# Altium PCB stmsheet.PcbDoc
Units mil, origin at the board's own origin, x right, y up, seen from the top; angles counter-clockwise.
Board outline 6000 x 4000 mil, 2 copper layers (Top Layer, Bottom Layer); 139 components, 90 nets, 397 pads, 1 vias.
Unrouted connection lines stored in the file: 169.
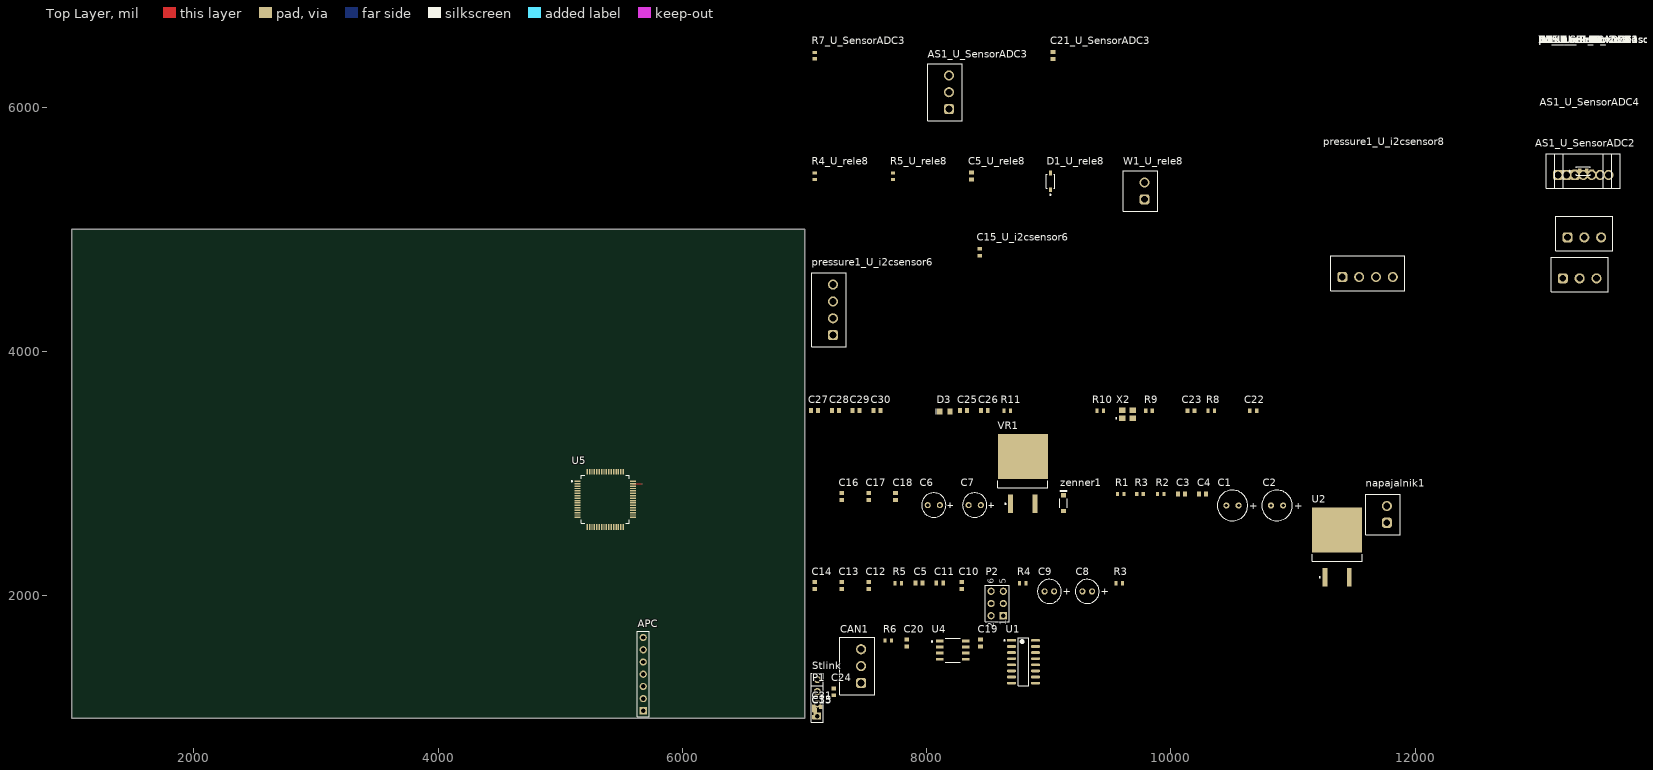
[diagram p0: Top Layer view]
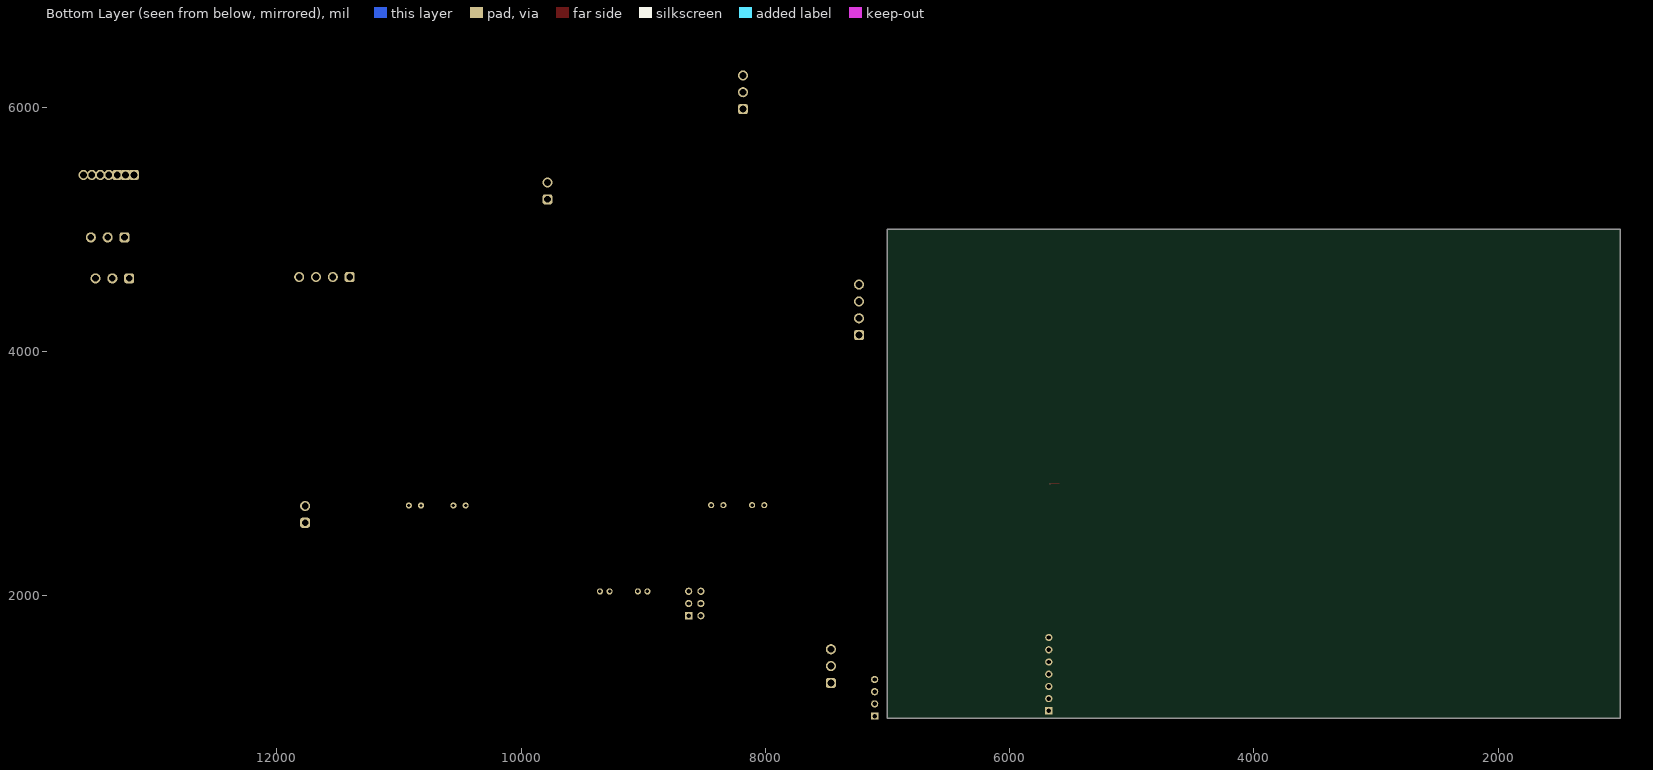
[diagram p1: Bottom Layer view, seen from below]

## Layer stack, top to bottom
Top Solder: solder mask 0.4, Solder Resist, Dk 3.5
Top Layer: signal copper 1.4
Dielectric 1: dielectric 12.6, FR-4, Dk 4.8
Bottom Layer: signal copper 1.4
Bottom Solder: solder mask 0.4, Solder Resist, Dk 3.5

## Board outline
1000,1000 7000,1000 7000,5000 1000,5000

## Design rules (kind name [scope] priority, off if disabled: settings)
Clearance [All] p1: gap=10 ignorepadtopadclearanceinfootprint=FALSE except(0: Arc-Hole Track-Hole SMDPad-Hole THPad-Hole Via-Hole Fill-Hole Poly-Hole Region-Hole Text-Hole)
PolygonConnect [All] p1: connectstyle=Relief reliefconductorwidth=10 reliefentries=4 polygonreliefangle="90 Angle" airgapwidth=10
RoutingVias [All] p1: holewidth=28 width=50 viastyle="Through Hole" minholewidth=28 minwidth=50 maxholewidth=28 maxwidth=50
SolderMaskExpansion [All] p1: expansion=4 istentingtop=FALSE
Width [All] p1: maxlimit=10 minlimit=10 preferedwidth=10
30 further rules are at their usual default settings.

## Classes and differential pairs
component class U_CAN: C19 C20 CAN1 R6 U4
channel class i2csensor: U_i2csensor1 U_i2csensor2 U_i2csensor3 U_i2csensor4 U_i2csensor5 U_i2csensor6 U_i2csensor7 U_i2csensor8
component class U_stmschematic: C22 C23 C24 C25 C26 C27 C28 C29 C30 D3 J? P1 R8 R9 R10 R11 Stlink U5 X2
component class U_i2csensor8: C15_U_i2csensor8 pressure1_U_i2csensor8
component class U_i2csensor7: C15_U_i2csensor7 pressure1_U_i2csensor7
component class U_i2csensor6: C15_U_i2csensor6 pressure1_U_i2csensor6
component class U_i2csensor5: C15_U_i2csensor5 pressure1_U_i2csensor5
component class U_i2csensor4: C15_U_i2csensor4 pressure1_U_i2csensor4
component class U_i2csensor3: C15_U_i2csensor3 pressure1_U_i2csensor3
component class U_i2csensor2: C15_U_i2csensor2 pressure1_U_i2csensor2
component class U_i2csensor1: C15_U_i2csensor1 pressure1_U_i2csensor1
component class U_napajalnik3.3: C1 C2 C3 C4 C6 C7 C15 C16 C17 C18 napajalnik1 Q1 R1 R2 R3 U2 VR1 zenner1
channel class SensorADC: U_SensorADC1 U_SensorADC2 U_SensorADC3 U_SensorADC4
channel class rele: U_rele1 U_rele2 U_rele3 U_rele4 U_rele5 U_rele6 U_rele7 U_rele8 U_rele9 U_rele10 U_rele11
component class U_SensorADC1: AS1_U_SensorADC1 C21_U_SensorADC1 R7_U_SensorADC1
component class U_SensorADC2: AS1_U_SensorADC2 C21_U_SensorADC2 R7_U_SensorADC2
component class U_SensorADC3: AS1_U_SensorADC3 C21_U_SensorADC3 R7_U_SensorADC3
component class U_SensorADC4: AS1_U_SensorADC4 C21_U_SensorADC4 R7_U_SensorADC4
component class U_rele11: C5_U_rele11 D1_U_rele11 Q2_U_rele11 R4_U_rele11 R5_U_rele11 W1_U_rele11
component class U_rele10: C5_U_rele10 D1_U_rele10 Q2_U_rele10 R4_U_rele10 R5_U_rele10 W1_U_rele10
component class U_rele9: C5_U_rele9 D1_U_rele9 Q2_U_rele9 R4_U_rele9 R5_U_rele9 W1_U_rele9
component class U_rele8: C5_U_rele8 D1_U_rele8 Q2_U_rele8 R4_U_rele8 R5_U_rele8 W1_U_rele8
component class U_rele7: C5_U_rele7 D1_U_rele7 Q2_U_rele7 R4_U_rele7 R5_U_rele7 W1_U_rele7
component class U_rele6: C5_U_rele6 D1_U_rele6 Q2_U_rele6 R4_U_rele6 R5_U_rele6 W1_U_rele6
component class U_rele5: C5_U_rele5 D1_U_rele5 Q2_U_rele5 R4_U_rele5 R5_U_rele5 W1_U_rele5
component class U_rele4: C5_U_rele4 D1_U_rele4 Q2_U_rele4 R4_U_rele4 R5_U_rele4 W1_U_rele4
component class U_rele3: C5_U_rele3 D1_U_rele3 Q2_U_rele3 R4_U_rele3 R5_U_rele3 W1_U_rele3
component class U_rele2: C5_U_rele2 D1_U_rele2 Q2_U_rele2 R4_U_rele2 R5_U_rele2 W1_U_rele2
component class U_rele1: C5_U_rele1 D1_U_rele1 Q2_U_rele1 R4_U_rele1 R5_U_rele1 W1_U_rele1
component class U_atmel: C5 C8 C9 C10 C11 C12 C13 C14 D2 P2 R3 R4 R5 U3 X1
component class stmsheet: APC C33 U1

## Components (designator, comment, footprint, x,y, rotation, side; value= is the part's Value field where it differs from the comment)
APC "Header 7" HDR1X7 5679.13,1058.86 r90 top
AS1_U_SensorADC1 "" 691321100003 13375.48,5477.85 r0 top (schematic designator AS1)
AS1_U_SensorADC2 "" 691321100003 13345.47,4630.91 r0 top (schematic designator AS1)
AS1_U_SensorADC3 "" 691321100003 8150.99,6123.33 r90 top (schematic designator AS1)
AS1_U_SensorADC4 "" 691321100003 13383.86,4966.53 r0 top (schematic designator AS1)
C1 "1uf" "C AlElko 6x__ R2.5" 10453.27,2740.29 r0 top
C2 "1uf" "C AlElko 6x__ R2.5" 10818.44,2740.29 r0 top
C3 "1uf" C0603 10087.11,2833.8 r0 top
C4 "1uf" C0603 10257.39,2833.8 r0 top
C5 "{Value}" C0603 7936.41,2104.43 r0 top
C5_U_rele1 "10uF" C0603 13375.48,5477.85 r0 top (schematic designator C5)
C5_U_rele2 "10uF" C0603 13375.48,5477.85 r0 top (schematic designator C5)
C5_U_rele3 "10uF" C0603 13375.48,5477.85 r0 top (schematic designator C5)
C5_U_rele4 "10uF" C0603 13375.48,5477.85 r0 top (schematic designator C5)
C5_U_rele5 "10uF" C0603 13375.48,5477.85 r0 top (schematic designator C5)
C5_U_rele6 "10uF" C0603 13375.48,5477.85 r0 top (schematic designator C5)
C5_U_rele7 "10uF" C0603 13375.48,5477.85 r0 top (schematic designator C5)
C5_U_rele8 "10uF" C0603 8365.57,5436.29 r90 top (schematic designator C5)
C5_U_rele9 "10uF" C0603 13375.48,5477.85 r0 top (schematic designator C5)
C5_U_rele10 "10uF" C0603 13375.48,5477.85 r0 top (schematic designator C5)
C5_U_rele11 "10uF" C0603 13375.48,5477.85 r0 top (schematic designator C5)
C6 "C+" "C AlElko R2.54 FI5" 8008.26,2743.24 r0 top
C7 "C+" "C AlElko R2.54 FI5" 8342.93,2743.24 r0 top
C8 "C+" "C AlElko 5x11 R2" 9314.43,2036.52 r0 top
C9 "C+" "C AlElko 5x11 R2" 9004.38,2036.52 r0 top
C10 "{Value}" C0603 8286.82,2084.75 r90 top
C11 "{Value}" C0603 8106.69,2104.43 r0 top
C12 "{Value}" C0603 7524.97,2084.75 r90 top
C13 "{Value}" C0603 7304.49,2084.75 r90 top
C14 "{Value}" C0603 7084.01,2084.75 r90 top
C15 "10uF" C0603 7084.01,1031.55 r90 top
C15_U_i2csensor1 "100nF" C0603 13375.48,5477.85 r0 top (schematic designator C15)
C15_U_i2csensor2 "100nF" C0603 13375.48,5477.85 r0 top (schematic designator C15)
C15_U_i2csensor3 "100nF" C0603 13375.48,5477.85 r0 top (schematic designator C15)
C15_U_i2csensor4 "100nF" C0603 13375.48,5477.85 r0 top (schematic designator C15)
C15_U_i2csensor5 "100nF" C0603 13375.48,5477.85 r0 top (schematic designator C15)
C15_U_i2csensor6 "100nF" C0603 8434.47,4813.23 r90 top (schematic designator C15)
C15_U_i2csensor7 "100nF" C0603 13375.48,5477.85 r0 top (schematic designator C15)
C15_U_i2csensor8 "100nF" C0603 13375.48,5477.85 r0 top (schematic designator C15)
C16 "10uF" C0603 7304.49,2814.11 r90 top
C17 "10uF" C0603 7524.97,2814.11 r90 top
C18 "10uF" C0603 7745.46,2814.11 r90 top
C19 "100nF" C0603 8441.36,1614.25 r90 top
C20 "100nF" C0603 7837,1614.25 r90 top
C21_U_SensorADC1 "1uF" C0603 13375.48,5477.85 r0 top (schematic designator C21)
C21_U_SensorADC2 "1uF" C0603 13375.48,5477.85 r0 top (schematic designator C21)
C21_U_SensorADC3 "1uF" C0603 9034.89,6423.54 r90 top (schematic designator C21)
C21_U_SensorADC4 "1uF" C0603 13375.48,5477.85 r0 top (schematic designator C21)
C22 "100n" C0603 10673.75,3514.94 r0 top
C23 "2.2uF" C0603 10163.88,3514.94 r0 top
C24 "100n" C0603 7238.54,1214.63 r90 top
C25 "10p" C0603 8302.57,3516.9 r0 top
C26 "10p" C0603 8471.87,3516.9 r0 top
C27 "100n" C0603 7082.04,3516.9 r0 top
C28 "100n" C0603 7252.32,3516.9 r0 top
C29 "100n" C0603 7421.62,3516.9 r0 top
C30 "4.7u" C0603 7591.91,3516.9 r0 top
C31 "100n" C0603 7104.68,1092.57 r0 top
C33 "100nF" C0603 7081.05,1036.47 r90 top
CAN1 "" 691321100003 7431.47,1425.27 r90 top
D1_U_rele1 "STPS0560Z" FP-SOD-123-MFG 13375.48,5477.85 r0 top (schematic designator D1)
D1_U_rele2 "STPS0560Z" FP-SOD-123-MFG 13375.48,5477.85 r0 top (schematic designator D1)
D1_U_rele3 "STPS0560Z" FP-SOD-123-MFG 13375.48,5477.85 r0 top (schematic designator D1)
D1_U_rele4 "STPS0560Z" FP-SOD-123-MFG 13375.48,5477.85 r0 top (schematic designator D1)
D1_U_rele5 "STPS0560Z" FP-SOD-123-MFG 13375.48,5477.85 r0 top (schematic designator D1)
D1_U_rele6 "STPS0560Z" FP-SOD-123-MFG 13375.48,5477.85 r0 top (schematic designator D1)
D1_U_rele7 "STPS0560Z" FP-SOD-123-MFG 13375.48,5477.85 r0 top (schematic designator D1)
D1_U_rele8 "STPS0560Z" FP-SOD-123-MFG 9013.24,5393.96 r90 top (schematic designator D1)
D1_U_rele9 "STPS0560Z" FP-SOD-123-MFG 13375.48,5477.85 r0 top (schematic designator D1)
D1_U_rele10 "STPS0560Z" FP-SOD-123-MFG 13375.48,5477.85 r0 top (schematic designator D1)
D1_U_rele11 "STPS0560Z" FP-SOD-123-MFG 13375.48,5477.85 r0 top (schematic designator D1)
D3 "150080BS75000" WL-SMCW_0805_150080xx75000 8149.02,3510.01 r0 top
napajalnik1 "napajalnik" 691321100002 11735.81,2667.45 r90 top
P1 "Header 3" HDR1X3 7104.68,1015.8 r90 top
P2 "Header 3X2" HDR2X3 8627.39,1837.69 r90 top
pressure1_U_i2csensor1 "COM&Heart" 691321100004 13375.48,5477.85 r0 top (schematic designator pressure1)
pressure1_U_i2csensor2 "COM&Heart" 691321100004 13375.48,5477.85 r0 top (schematic designator pressure1)
pressure1_U_i2csensor3 "COM&Heart" 691321100004 13375.48,5477.85 r0 top (schematic designator pressure1)
pressure1_U_i2csensor4 "COM&Heart" 691321100004 13375.48,5477.85 r0 top (schematic designator pressure1)
pressure1_U_i2csensor5 "COM&Heart" 691321100004 13375.48,5477.85 r0 top (schematic designator pressure1)
pressure1_U_i2csensor6 "COM&Heart" 691321100004 7201.14,4341.75 r90 top (schematic designator pressure1)
pressure1_U_i2csensor7 "COM&Heart" 691321100004 13375.48,5477.85 r0 top (schematic designator pressure1)
pressure1_U_i2csensor8 "COM&Heart" 691321100004 11609.25,4641.73 r0 top (schematic designator pressure1)
R1 "440" R0603 9588.07,2833.8 r0 top
R2 "220" R0603 9916.82,2833.8 r0 top
R3 "{Value}" R0603 9576.25,2104.43 r0 top
R3 "R1" R0603 9746.54,2833.8 r0 top value=100k
R4 "{Value}" R0603 8785.86,2104.43 r0 top
R4_U_rele1 "12k" R0603 13375.48,5477.85 r0 top (schematic designator R4)
R4_U_rele2 "12k" R0603 13375.48,5477.85 r0 top (schematic designator R4)
R4_U_rele3 "12k" R0603 13375.48,5477.85 r0 top (schematic designator R4)
R4_U_rele4 "12k" R0603 13375.48,5477.85 r0 top (schematic designator R4)
R4_U_rele5 "12k" R0603 13375.48,5477.85 r0 top (schematic designator R4)
R4_U_rele6 "12k" R0603 13375.48,5477.85 r0 top (schematic designator R4)
R4_U_rele7 "12k" R0603 13375.48,5477.85 r0 top (schematic designator R4)
R4_U_rele8 "12k" R0603 7084.01,5436.29 r90 top (schematic designator R4)
R4_U_rele9 "12k" R0603 13375.48,5477.85 r0 top (schematic designator R4)
R4_U_rele10 "12k" R0603 13375.48,5477.85 r0 top (schematic designator R4)
R4_U_rele11 "12k" R0603 13375.48,5477.85 r0 top (schematic designator R4)
R5 "{Value}" R0603 7766.13,2104.43 r0 top
R5_U_rele1 "100k" R0603 13375.48,5477.85 r0 top (schematic designator R5)
R5_U_rele2 "100k" R0603 13375.48,5477.85 r0 top (schematic designator R5)
R5_U_rele3 "100k" R0603 13375.48,5477.85 r0 top (schematic designator R5)
R5_U_rele4 "100k" R0603 13375.48,5477.85 r0 top (schematic designator R5)
R5_U_rele5 "100k" R0603 13375.48,5477.85 r0 top (schematic designator R5)
R5_U_rele6 "100k" R0603 13375.48,5477.85 r0 top (schematic designator R5)
R5_U_rele7 "100k" R0603 13375.48,5477.85 r0 top (schematic designator R5)
R5_U_rele8 "100k" R0603 7724.79,5436.29 r90 top (schematic designator R5)
R5_U_rele9 "100k" R0603 13375.48,5477.85 r0 top (schematic designator R5)
R5_U_rele10 "100k" R0603 13375.48,5477.85 r0 top (schematic designator R5)
R5_U_rele11 "100k" R0603 13375.48,5477.85 r0 top (schematic designator R5)
R6 "120" R0603 7686.4,1634.92 r0 top
R7_U_SensorADC1 "{Value}" R0603 13375.48,5477.85 r0 top (schematic designator R7)
R7_U_SensorADC2 "{Value}" R0603 13375.48,5477.85 r0 top (schematic designator R7)
R7_U_SensorADC3 "{Value}" R0603 7084.01,6423.54 r90 top (schematic designator R7)
R7_U_SensorADC4 "{Value}" R0603 13375.48,5477.85 r0 top (schematic designator R7)
R8 "10k" R0603 10330.23,3516.9 r0 top
R9 "10R" R0603 9820.36,3516.9 r0 top
R10 "10k" R0603 9421.72,3516.9 r0 top
R11 "100" R0603 8660.86,3516.9 r0 top
Stlink "Header 4" HDR1X4 7104.68,1015.8 r90 top
U1 "74HC4051D,653" FP-SOT109-1-IPC_B 8792.75,1460.7 r0 top
U2 "LM317D2T-TR" TO-263_N 11359.66,2399.61 r90 top
U4 "MCP2558FD-H/SN" FP-C04-057-SN-MFG 8212.01,1556.18 r0 top
U5 "STM32G431RBT6" FP-LQFP64-5W-MFG 5368.11,2790.35 r0 top
VR1 "L7805ACD2T-TR" TO-263_N 8786.42,3001.97 r90 top
W1_U_rele1 "" 691321100002 13375.48,5477.85 r0 top (schematic designator W1)
W1_U_rele2 "" 691321100002 13375.48,5477.85 r0 top (schematic designator W1)
W1_U_rele3 "" 691321100002 13375.48,5477.85 r0 top (schematic designator W1)
W1_U_rele4 "" 691321100002 13375.48,5477.85 r0 top (schematic designator W1)
W1_U_rele5 "" 691321100002 13375.48,5477.85 r0 top (schematic designator W1)
W1_U_rele6 "" 691321100002 13375.48,5477.85 r0 top (schematic designator W1)
W1_U_rele7 "" 691321100002 13375.48,5477.85 r0 top (schematic designator W1)
W1_U_rele8 "" 691321100002 9751.46,5315.22 r90 top (schematic designator W1)
W1_U_rele9 "" 691321100002 13375.48,5477.85 r0 top (schematic designator W1)
W1_U_rele10 "" 691321100002 13375.48,5477.85 r0 top (schematic designator W1)
W1_U_rele11 "" 691321100002 13375.48,5477.85 r0 top (schematic designator W1)
X2 "TSX-3225 24.0000MF15X-AC3" EPSON-TSX-3225_V 9643.19,3486.39 r0 top
zenner1 "MMSZ5248B" FAIR-SOD-123-2_V 9120.52,2758.99 r90 top

## Footprints (in the part's own frame and the unit in brackets; to place one, negate y for a bottom-side part, rotate by r counter-clockwise, add the part's x,y. Pads: shape width x height; smd on the part's side, far side on the other; paste and mask are expansions set on the pad)
691321100002 [mm] "Vertical PCB Header, pitch 3.5mm, 02p"
  rrect50% 2.1x2.1 hole 1.4: 1(-1.75,-0.8)
  round 2.1 hole 1.4: 2(1.75,-0.8)
  silkscreen extent -4.2,-3.6 4.2,3.6, body extent -4.2,-3.6 4.2,3.6, height 9.3
691321100003 [mm] "Vertical PCB Header, pitch 3.5mm, 03p"
  rrect50% 2.1x2.1 hole 1.4: 1(-3.5,-0.8)
  round 2.1 hole 1.4: 2(0,-0.8) 3(3.5,-0.8)
  silkscreen extent -5.95,-3.6 5.95,3.6, body extent -5.95,-3.6 5.95,3.6, height 9.3
691321100004 [mm] "Vertical PCB Header, pitch 3.5mm, 04p"
  rrect50% 2.1x2.1 hole 1.4: 1(-5.25,-0.8)
  round 2.1 hole 1.4: 2(-1.75,-0.8) 3(1.75,-0.8) 4(5.25,-0.8)
  silkscreen extent -7.7,-3.6 7.7,3.6, body extent -7.7,-3.6 7.7,3.6, height 9.3
C0603 [mm] "Chip Capacitor, 2-Leads, Body 1,60x0,81mm, IPC Medium Density"
  rect 0.8x1 smd: 1(-0.725,0) 2(0.725,0)
  body extent -0.8,-0.4 0.8,0.4, height 0.81
"C AlElko 5x11 R2" [mil]
  round 50 hole 28: 1(39.37,0) 2(-39.37,0)
  silkscreen extent -98,-98 98,98, body extent -98,-98 98,98, height 434
"C AlElko 6x__ R2.5" [mil]
  round 50 hole 28: 1(100,0) 2(0,0)
  silkscreen extent -75,-125 175,125, body extent -75,-125 175,125, height 111
"C AlElko R2.54 FI5" [mil]
  round 50 hole 28: 1(100,0) 2(0,0)
  silkscreen extent -50,-100 205,100, body extent -75,-125 175,125, height 111
EPSON-TSX-3225_V [mm] "SMD, 4-Leads, Body 3.2x2.5mm"
  rect 1.4x1.15 smd: 1(-1.1,-0.8) 2(1.1,-0.8) 3(1.1,0.8) 4(-1.1,0.8)
  silkscreen extent -2.47,-0.92 -2.22,-0.68, body extent -1.6,-1.25 1.6,1.25, height 0.6
FAIR-SOD-123-2_V [mm] "SOD123, 2-Leads, Body 2.7x1.6mm"
  rect 0.88x1.02 smd: 1(-1.635,0) 2(1.635,0)
  silkscreen extent -0.92,-0.8 2.58,0.8, body extent -1.35,-0.8 1.35,0.8, height 1.28
FP-C04-057-SN-MFG [mm]
  rect 1.55x0.6 smd paste+0 mask+0: 1(-2.7,1.905) 2(-2.7,0.635) 3(-2.7,-0.635) 4(-2.7,-1.905) 5(2.7,-1.905) 6(2.7,-0.635) 7(2.7,0.635) 8(2.7,1.905)
  silkscreen extent -4.42,-2.5 1.55,2.5, body extent -3.57,-2.75 3.57,2.75, height 0.25
FP-LQFP64-5W-MFG [mm]
  rect 1.2x0.3 smd paste+0 mask+0: 1(-5.75,3.75) 2(-5.75,3.25) 3(-5.75,2.75) 4(-5.75,2.25) 5(-5.75,1.75) 6(-5.75,1.25) 7(-5.75,0.75) 8(-5.75,0.25) 9(-5.75,-0.25) 10(-5.75,-0.75) 11(-5.75,-1.25) 12(-5.75,-1.75) 13(-5.75,-2.25) 14(-5.75,-2.75) 15(-5.75,-3.25) 16(-5.75,-3.75) 33(5.75,-3.75) 34(5.75,-3.25) 35(5.75,-2.75) 36(5.75,-2.25) 37(5.75,-1.75) 38(5.75,-1.25) 39(5.75,-0.75) 40(5.75,-0.25) 41(5.75,0.25) 42(5.75,0.75) 43(5.75,1.25) 44(5.75,1.75) 45(5.75,2.25) 46(5.75,2.75) 47(5.75,3.25) 48(5.75,3.75)
  rect 0.3x1.2 smd paste+0 mask+0: 17(-3.75,-5.75) 18(-3.25,-5.75) 19(-2.75,-5.75) 20(-2.25,-5.75) 21(-1.75,-5.75) 22(-1.25,-5.75) 23(-0.75,-5.75) 24(-0.25,-5.75) 25(0.25,-5.75) 26(0.75,-5.75) 27(1.25,-5.75) 28(1.75,-5.75) 29(2.25,-5.75) 30(2.75,-5.75) 31(3.25,-5.75) 32(3.75,-5.75) 49(3.75,5.75) 50(3.25,5.75) 51(2.75,5.75) 52(2.25,5.75) 53(1.75,5.75) 54(1.25,5.75) 55(0.75,5.75) 56(0.25,5.75) 57(-0.25,5.75) 58(-0.75,5.75) 59(-1.25,5.75) 60(-1.75,5.75) 61(-2.25,5.75) 62(-2.75,5.75) 63(-3.25,5.75) 64(-3.75,5.75)
  silkscreen extent -7.05,-5 5,5, body extent -6.45,-6.45 6.45,6.45, height 0.25
FP-SOD-123-MFG [mm]
  rect 0.97x0.65 smd paste+0 mask+0: 1(-1.74,0) 2(1.74,0)
  silkscreen extent -2.92,-0.85 1.43,0.85, body extent -2.32,-0.95 2.32,0.95, height 0.25
FP-SOT109-1-IPC_B [mil]
  rect 74.98x22.36 smd paste+0 mask+0: 1(-98.46,175)
  rrect100% 74.98x22.36 smd paste+0 mask+0: 2(-98.46,125) 3(-98.46,75) 4(-98.46,25) 5(-98.46,-25) 6(-98.46,-75) 7(-98.46,-125) 8(-98.46,-175) 9(98.46,-175) 10(98.46,-125) 11(98.46,-75) 12(98.46,-25) 13(98.46,25) 14(98.46,75) 15(98.46,125) 16(98.46,175)
  silkscreen extent -161,-195 41,195, body extent -146,-205 146,205, height 10
HDR1X3 [mm] "Connector; Header; 3 Position"
  rect 1.5x1.5 hole 0.9: 1(0,0)
  round 1.5 hole 0.9: 2(2.54,0) 3(5.08,0)
  silkscreen extent -1.27,-1.27 6.35,1.27
HDR1X4 [mm] "Connector; Header; 4 Position"
  rect 1.5x1.5 hole 0.9: 1(0,0)
  round 1.5 hole 0.9: 2(2.54,0) 3(5.08,0) 4(7.62,0)
  silkscreen extent -1.27,-1.27 8.89,1.27
HDR1X7 [mm] "Connector; Header; 7 Position"
  rect 1.5x1.5 hole 0.9: 1(0,0)
  round 1.5 hole 0.9: 2(2.54,0) 3(5.08,0) 4(7.62,0) 5(10.16,0) 6(12.7,0) 7(15.24,0)
  silkscreen extent -1.27,-1.27 16.51,1.27
HDR2X3 [mm] "Connector; Header; 3x2 Position"
  rect 1.5x1.5 hole 0.9: 1(0,0)
  round 1.5 hole 0.9: 2(0,2.54) 3(2.54,0) 4(2.54,2.54) 5(5.08,0) 6(5.08,2.54)
  silkscreen extent -1.27,-1.27 6.35,3.81
R0603 [mm] "Chip Resistor, 2-Leads, Body 1,55x0,85mm, IPC Medium Density"
  rect 0.65x0.9 smd: 1(-0.675,0) 2(0.675,0)
  body extent -0.8,-0.41 0.8,0.41, height 0.45
TO-263_N [mm] "D2-PAK, 4-Leads, Body 9.2x10.2mm, Pitch 2.54mm, Lead Span 15.4mm, IPC Medium Density"
  rect 3.8x1 smd: 1(-6.3,2.54) 3(-6.3,-2.54)
  rect 9.3x10.4 smd: 4(3.55,0)
  silkscreen extent -6.42,-5.2 -1.5,5.2, body extent -2.95,-5.2 6.4,5.2, height 4.6
WL-SMCW_0805_150080xx75000 [mm] "SMD Mono-color Chip LED, body 2.0x1.25mm"
  rect 1.1x1.3 smd: 1(-1.05,0) 2(1.05,0)
  silkscreen extent -2,-0.6 -1.8,0.6, body extent -1,-0.63 1,0.62, height 0.7

## Part data
APC: "Header, 7-Pin", LatestRevisionDate=17-Jul-2002, LatestRevisionNote="Re-released for DXP Platform.", Publisher="Altium Limited"
AS1_U_SensorADC1 AS1_U_SensorADC2 AS1_U_SensorADC3 AS1_U_SensorADC4 CAN1: library part CMP-1502-01784-2, Color=Green, Current=10A, Current Rating=10.5A, Voltage=300V, Contact Gender=Male, Contact Material=Brass, Gender=Male, Height=12.7mm, Lead Free="Lead Free", Lead Pitch=3.5mm, Length=7mm, Mount="Through Hole", NexarPartId=18818341, Number of Contacts=3, Number of Levels=1, Number of Pins=3, Number of Positions Per Level=3, Number of Rows=1, Orientation=Vertical, Packaging=Box, Pitch=3.5052mm, REACH SVHC=Unknown, RoHS=Compliant, Termination=Solder, Width=15.1mm
C1 C2: library part C+, "Capacitor Polarized"
C3 C4 C5 C5_U_rele1 C5_U_rele2 C5_U_rele3 C5_U_rele4 C5_U_rele5 C5_U_rele6 C5_U_rele7 C5_U_rele8 C5_U_rele9 C5_U_rele10 C5_U_rele11 C10 C11 C12 C13 C14 C15 C15_U_i2csensor1 C15_U_i2csensor2 C15_U_i2csensor3 C15_U_i2csensor4 C15_U_i2csensor5 C15_U_i2csensor6 C15_U_i2csensor7 C15_U_i2csensor8 C16 C17 C18 C19 C20 C21_U_SensorADC1 C21_U_SensorADC2 C21_U_SensorADC3 C21_U_SensorADC4 C22 C23 C24 C25 C26 C27 C28 C29 C30 C31 C33: library part C, "Capacitor"
C6 C7 C8 C9: "Capacitor Polarized"
D1_U_rele1 D1_U_rele2 D1_U_rele3 D1_U_rele4 D1_U_rele5 D1_U_rele6 D1_U_rele7 D1_U_rele8 D1_U_rele9 D1_U_rele10 D1_U_rele11: library part CMP-12187-000036-1, "DIODE SCHOTTKY 60V 500MA SOD123", Average Rectified Current=500mA, Forward Voltage=660mV, Max Forward Surge Current (Ifsm)=5.5A, Max Operating Temperature=150°C, Max Repetitive Reverse Voltage (Vrrm)=60V, Max Reverse Current=50uA, Min Operating Temperature=-65°C, Package Body Material=Plastic, Package Quantity=1, Package Shape=Rectangular, Additional Feature="FREE WHEELING DIODE", Contact Plating=Tin, Current Rating=500mA, Diode Element Material=SILICON, Element Configuration=Single, Forward Current=500mA, Height=1.35mm, JESD-30 Code=R-PDSO-G2, Lead Free="Lead Free", Length=2.85mm, Max Reverse Leakage Current=50uA, Max Reverse Voltage (DC)=60V, Max Surge Current=5.5A, Mount="Surface Mount", Number of Elements=1, Number of Pins=2, Number of Terminals/Pins=2, Output Current=500mA, Packaging="Tape and Reel", Peak Non-Repetitive Surge Current=5.5A, Polarity=Standard, Radiation Hardening=No, REACH SVHC="No SVHC", RoHS Compliant=Yes, Series=-, Surface Mount=Yes, Technology=SCHOTTKY, Terminal Form="Gull Wing", Terminal Position=DUAL, Voltage Rating (DC)=60V, Weight=0.01lb, Width=1.7mm
D3: library part CMP-1426-00008-6, Case Code (Imperial)=0805, Case Code (Metric)=2012, Color=Blue, Forward Current=100mA, Forward Voltage=3.2V, Max Junction Temperature (Tj)=95°C, Max Operating Temperature=85°C, Max Reverse Voltage (DC)=5V, Min Operating Temperature=-40°C, Power Dissipation=105mW, Test Current=20mA, Case/Package=0805, Dominant Wavelength=470nm, Height=700µm, Lead Free="Lead Free", Length=2mm, Lens Style="Clear, Rectangular", Luminous Intensity=145mcd, Mount="Surface Mount", NexarPartId=29717779, Packaging="Tape and Reel", Peak Wavelength=465nm, REACH SVHC=Unknown, Reverse Voltage=5V, RoHS=Compliant, Viewing Angle=140°, Wavelength=470nm, Width=1.25mm
napajalnik1 W1_U_rele1 W1_U_rele2 W1_U_rele3 W1_U_rele4 W1_U_rele5 W1_U_rele6 W1_U_rele7 W1_U_rele8 W1_U_rele9 W1_U_rele10 W1_U_rele11: library part CMP-1502-01783-2, Color=Green, Current=10A, Max Operating Temperature=105°C, Min Operating Temperature=-40°C, Voltage=300V, Contact Material=Brass, Current Rating=10A, Gender=Male, Height=7.2mm, Lead Free="Lead Free", Lead Pitch=3.5mm, Length=7mm, Mount="Through Hole", NexarPartId=18818340, Number of Contacts=2, Number of Levels=1, Number of Pins=2, Number of Positions Per Level=2, Number of Rows=1, Orientation=Vertical, Packaging=Box, Pitch=3.5052mm, REACH SVHC=Unknown, RoHS=Compliant, Termination=Solder, Voltage Rating=300V, Width=8.1mm
P1: "Header, 3-Pin", LatestRevisionDate=17-Jul-2002, LatestRevisionNote="Re-released for DXP Platform.", Publisher="Altium Limited"
P2: "Header, 3-Pin, Dual row", LatestRevisionDate=17-Jul-2002, LatestRevisionNote="Re-released for DXP Platform.", Publisher="Altium Limited"
pressure1_U_i2csensor1 pressure1_U_i2csensor2 pressure1_U_i2csensor3 pressure1_U_i2csensor4 pressure1_U_i2csensor5 pressure1_U_i2csensor6 pressure1_U_i2csensor7 pressure1_U_i2csensor8: library part CMP-1502-01785-2, Color=Green, Current=10A, Current Rating=10.5A, Max Operating Temperature=105°C, Min Operating Temperature=-40°C, Voltage=300V, Contact Material=Brass, Gender=Male, Height=9.4mm, Lead Free="Lead Free", Lead Pitch=3.5mm, Length=7mm, Mount="Through Hole", NexarPartId=18818342, Number of Contacts=4, Number of Levels=1, Number of Pins=4, Number of Positions Per Level=4, Number of Rows=1, Orientation=Vertical, Packaging=Box, Pitch=3.5052mm, REACH SVHC=Unknown, RoHS=Compliant, Termination=Solder, Voltage Rating=300V, Width=18.6mm
R1 R2 R3 R4 R4_U_rele1 R4_U_rele2 R4_U_rele3 R4_U_rele4 R4_U_rele5 R4_U_rele6 R4_U_rele7 R4_U_rele8 R4_U_rele9 R4_U_rele10 R4_U_rele11 R5 R5_U_rele1 R5_U_rele2 R5_U_rele3 R5_U_rele4 R5_U_rele5 R5_U_rele6 R5_U_rele7 R5_U_rele8 R5_U_rele9 R5_U_rele10 R5_U_rele11 R6 R7_U_SensorADC1 R7_U_SensorADC2 R7_U_SensorADC3 R7_U_SensorADC4 R8 R9 R10 R11: library part R, "R"
R3: library part R
Stlink: "Header, 4-Pin", LatestRevisionDate=17-Jul-2002, LatestRevisionNote="Re-released for DXP Platform.", Publisher="Altium Limited"
U1: library part CMP-14339-000003-1, "IC MUX/DEMUX 8X1 16SOIC"
U2: library part CMP-0244-00094-1, "1.5A, 1.2V to 37V Adjustable Voltage Regulator, 3-Pin D2PAK, Tape and Reel", ComponentLink1Description="Manufacturer URL", ComponentLink1URL=http://www.st.com, ComponentLink2Description=Datasheet, ComponentLink2URL=http://www.st.com/internet/com/TECHNICAL_RESOURCES/TECHNICAL_LITERATURE/DATASHEET/CD00000455.pdf, DatasheetVersion=1/11/2011, PackageDescription="3-Pin Transistor Outline Package 2.54 mm Pitch, 15.4 mm Lead Span (D2PAK)", PackageReference=TO-263, PackageVersion=2011
U4: library part CMP-06279-000003-1, "IC TRANSCEIVER 1/1 8SOIC", Ambient Temperature Range High=+150°C, Ambient Temperature Range Low=-40°C, Manufacturer="Microchip Technology", Max Junction Temp=+175°C, Max Supply Voltage=5.5V, Min Supply Voltage=1.7V, Nominal Supply Current=2.5-95mA, Package=C04-057-SN, Temperature="-40°C to +150°C", Automotive=No, Category=IC, ComponentLink2Description=Datasheet, ComponentLink2URL=http://ww1.microchip.com/downloads/en/DeviceDoc/20005533A.pdf, Device Class L1="Integrated Circuits (ICs)", Device Class L2="Interface ICs", Device Class L3=unset, Digikey Description="IC TRANSCEIVER 1/1 8SOIC", Footprint Url=http://ww1.microchip.com/downloads/en/DeviceDoc/08L_SOIC_150_3dot9mm_SN_C04-00057e.pdf, Height=1.75mm, Interface=CAN, Lead Free=Yes, Manufacturer Part Number=MCP2558FD-H/SN, Mouser Description="In a Pack of 10, Microchip Technology MCP2558FD-H/SN, CAN Transceiver 8Mbit/s 1-Channel CAN, 8-Pin SOIC", Octopart=https://octopart.com/mcp2558fd-h%2Fsn-microchip-71590966, RoHS=TRUE, Standoff Height=0.1mm, Temperature Range High=+150°C, Temperature Range Low=-40°C
U5: library part CMP-12105-000150-1, "IC MCU 32BIT 128KB FLASH 64LQFP", RoHS Compliant=Yes
VR1: library part CMP-0244-00214-1, "Positive Voltage Regulator, 3-Pin D2PAK, Tape and Reel", ComponentLink1Description="Manufacturer URL", ComponentLink1URL=http://www.st.com, ComponentLink2Description=Datasheet, ComponentLink2URL=http://www.st.com/internet/com/TECHNICAL_RESOURCES/TECHNICAL_LITERATURE/DATASHEET/CD00000444.pdf, DatasheetVersion=16/11/2011, PackageDescription="3-Pin Transistor Outline Package 2.54 mm Pitch, 15.4 mm Lead Span (D2PAK)", PackageReference=TO-263, PackageVersion=2011
X2: library part CMP-2000-07333-1, "MHz Range Crystal, 24 MHz, -40 to 85 degC, 4-Pin SMD, RoHS, Tape and Reel", Frequency=24MHz, Frequency Stability=10PPM, Load Capacitance=9pF, Manufacturer=Epson, Operating Temperature Range=-40Cto+85C, Package / Case=3.2mmx2.5mm, Package Description="4-Pin Surface Mount Device, Body 3.2 x 2.5 mm", Package Reference=TSX-3225, Brand=EpsonTiming, Datasheet URL=https://support.epson.biz/td/api/doc_check.php?dl=brief_FA-238V_en.pdf, Datasheet Version=12/2015, Drive Level=200uW, ESR=40Ohms, Factory Pack Quantity=250, Height=0.6mm, Length=3.2mm, Manufacturer URL=https://www.eea.epson.com/, Mounting Style=SMD/SMT, Mounting Technology=SurfaceMount, Packaging=Reel, Product Category=Crystals, RoHS=True, Series=TSX-3225, Termination Style=SMD/SMT, Tolerance=10PPM, Type=Crystal, Unit Weight=0.000564oz, Width=2.5mm
zenner1: library part CMP-2000-06744-1, "Zener Diode, 18 V, -55 to 150 degC, 2-Pin SOD-123, RoHS, Tape and Reel", Forward voltage reference=10mA, Manuf. Code=FSC, Manufacturer=FairchildSemiconductor, Max. operating temperature=+150°C, Max. power=500mW, Operating temperature (min.)=-55°C, Package Description="2-Pin Surface Mount Device, Body 2.7 x 1.6 mm", Package Reference=SOD-123-2, Residual reverse leakage current=0.1µA, Zener voltage=18V, Category=Zenerdiode, Configuration=1diode, Datasheet URL=https://www.fairchildsemi.com/datasheets/MM/MMSZ5226B.pdf, Datasheet Version="Rev. 1.6, 10/2015", Enclosure=SOD123, Impedance=21Ω, Impedance reference=7mA, Manufacturer URL=https://www.fairchildsemi.com/, Mounting Technology=SurfaceMount, Mounting type=Surface-mount, Type=MMSZ5248B, UF=900mV, Uz (max.)=18.9V, Uz(min.)=17.1V

## Via types
v1: diameter 10, hole 4, Top Layer to Bottom Layer, 1 vias

## Nets (pads, with @x,y where several pads share a name; then routed paths per layer and width w, separated by ;. In a path a pad name is that pad's centre, name@x,y a point inside that pad or via, vN(x,y) a via of type N, cw(c..) or ccw(c..) an arc to the next point about the centre after c; other vN are vias at no path point)
3V3: C15_U_i2csensor1.1 C15_U_i2csensor2.1 C15_U_i2csensor3.1 C15_U_i2csensor4.1 C15_U_i2csensor5.1 C15_U_i2csensor6.1 C15_U_i2csensor7.1 C15_U_i2csensor8.1 pressure1_U_i2csensor1.4 pressure1_U_i2csensor2.4 pressure1_U_i2csensor3.4 pressure1_U_i2csensor4.4 pressure1_U_i2csensor5.4 pressure1_U_i2csensor6.4 pressure1_U_i2csensor7.4 pressure1_U_i2csensor8.4
+3V3: AS1_U_SensorADC1.3 AS1_U_SensorADC2.3 AS1_U_SensorADC3.3 AS1_U_SensorADC4.3 C2.1 C4.1 C21_U_SensorADC1.1 C21_U_SensorADC2.1 C21_U_SensorADC3.1 C21_U_SensorADC4.1 C22.2 P1.2 R2.1 Stlink.1 U2.4
+3V3_ST: C20.1 C24.1 C27.1 C28.1 C29.1 C30.1 C31.1 P1.1 R8.1 R11.2 U4.5 U5.1 U5.16 U5.28 U5.29 U5.32 U5.48 U5.64
+5: APC.6 C5.1 C8.1 C9.1 C13.2 C14.2 C17.1 C18.1 C33.2 P2.2 R4.1 U1.16 VR1.3
GND: APC.7 AS1_U_SensorADC1.1 AS1_U_SensorADC2.1 AS1_U_SensorADC3.1 AS1_U_SensorADC4.1 C1.2 C2.2 C3.2 C4.2 C5.2 C5_U_rele1.2 C5_U_rele2.2 C5_U_rele3.2 C5_U_rele4.2 C5_U_rele5.2 C5_U_rele6.2 C5_U_rele7.2 C5_U_rele8.2 C5_U_rele9.2 C5_U_rele10.2 C5_U_rele11.2 C6.2 C7.2 C8.2 C9.2 C10.1 C11.1 C12.1 C13.1 C14.1 C15.2 C15_U_i2csensor1.2 C15_U_i2csensor2.2 C15_U_i2csensor3.2 C15_U_i2csensor4.2 C15_U_i2csensor5.2 C15_U_i2csensor6.2 C15_U_i2csensor7.2 C15_U_i2csensor8.2 C16.2 C17.2 C18.2 C19.2 C20.2 C21_U_SensorADC1.2 C21_U_SensorADC2.2 C21_U_SensorADC3.2 C21_U_SensorADC4.2 C22.1 C23.1 C24.2 C25.2 C26.2 C27.2 C28.2 C29.2 C31.2 C33.1 CAN1.1 D3.1 P2.6 pressure1_U_i2csensor1.3 pressure1_U_i2csensor2.3 pressure1_U_i2csensor3.3 pressure1_U_i2csensor4.3 pressure1_U_i2csensor5.3 pressure1_U_i2csensor6.3 pressure1_U_i2csensor7.3 pressure1_U_i2csensor8.3 R1.2 R4_U_rele1.2 R4_U_rele2.2 R4_U_rele3.2 R4_U_rele4.2 R4_U_rele5.2 R4_U_rele6.2 R4_U_rele7.2 R4_U_rele8.2 R4_U_rele9.2 R4_U_rele10.2 R4_U_rele11.2 R5_U_rele1.2 R5_U_rele2.2 R5_U_rele3.2 R5_U_rele4.2 R5_U_rele5.2 R5_U_rele6.2 R5_U_rele7.2 R5_U_rele8.2 R5_U_rele9.2 R5_U_rele10.2 R5_U_rele11.2 R9.2 R10.2 Stlink.3 U1.7 U1.8 U4.2 U5.15 U5.27 U5.31 U5.47 U5.63 VR1.4 X2.2 X2.4 zenner1.1 | length 74.8
  Top Layer w10: U5.47 v1(5669.29,2918.31)
"MCU OSC IN": C25.1 U5.5 X2.1
"MCU OSC OUT": C26.1 U5.6 X2.3
MCU_JTICK_SWSCLK: Stlink.2 U5.50
MCU_NRST: C23.2 R8.2 U5.7
MCU_SYS_JTSM_SWDIO: Stlink.4 U5.49
MISO: P2.1
MOSI: P2.4
NetAS1_U_SensorADC1_2: AS1_U_SensorADC1.2 R7_U_SensorADC1.1
NetAS1_U_SensorADC2_2: AS1_U_SensorADC2.2 R7_U_SensorADC2.1
NetAS1_U_SensorADC3_2: AS1_U_SensorADC3.2 R7_U_SensorADC3.1
NetAS1_U_SensorADC4_2: AS1_U_SensorADC4.2 R7_U_SensorADC4.1
NetC10_2: C10.2
NetC11_2: C11.2 R5.1
NetC12_2: C12.2 R5.2
NetC19_1: C19.1 U4.3
NetC30_2: C30.2 R9.1
NetCAN1_2: CAN1.2 R6.2 U4.6
NetCAN1_3: CAN1.3 R6.1 U4.7
NetD1_U_rele1_2: D1_U_rele1.2 R5_U_rele1.1 W1_U_rele1.2
NetD1_U_rele2_2: D1_U_rele2.2 R5_U_rele2.1 W1_U_rele2.2
NetD1_U_rele3_2: D1_U_rele3.2 R5_U_rele3.1 W1_U_rele3.2
NetD1_U_rele4_2: D1_U_rele4.2 R5_U_rele4.1 W1_U_rele4.2
NetD1_U_rele5_2: D1_U_rele5.2 R5_U_rele5.1 W1_U_rele5.2
NetD1_U_rele6_2: D1_U_rele6.2 R5_U_rele6.1 W1_U_rele6.2
NetD1_U_rele7_2: D1_U_rele7.2 R5_U_rele7.1 W1_U_rele7.2
NetD1_U_rele8_2: D1_U_rele8.2 R5_U_rele8.1 W1_U_rele8.2
NetD1_U_rele9_2: D1_U_rele9.2 R5_U_rele9.1 W1_U_rele9.2
NetD1_U_rele10_2: D1_U_rele10.2 R5_U_rele10.1 W1_U_rele10.2
NetD1_U_rele11_2: D1_U_rele11.2 R5_U_rele11.1 W1_U_rele11.2
NetD2_2: R3.2@9602.83,2104.43
NetD3_2: D3.2 R11.1
Netnapajalnik1_1: napajalnik1.1
Netpressure1_U_i2csensor1_1: pressure1_U_i2csensor1.1 U1.13
Netpressure1_U_i2csensor2_1: pressure1_U_i2csensor2.1 U1.14
Netpressure1_U_i2csensor3_1: pressure1_U_i2csensor3.1 U1.15
Netpressure1_U_i2csensor4_1: pressure1_U_i2csensor4.1 U1.12
Netpressure1_U_i2csensor5_1: pressure1_U_i2csensor5.1 U1.1
Netpressure1_U_i2csensor6_1: pressure1_U_i2csensor6.1 U1.5
Netpressure1_U_i2csensor7_1: pressure1_U_i2csensor7.1 U1.2
Netpressure1_U_i2csensor8_1: pressure1_U_i2csensor8.1 U1.4
NetQ1_1: R3.2@9773.11,2833.8 zenner1.2
NetQ2_U_rele1_1: R4_U_rele1.1
NetQ2_U_rele2_1: R4_U_rele2.1
NetQ2_U_rele3_1: R4_U_rele3.1
NetQ2_U_rele4_1: R4_U_rele4.1
NetQ2_U_rele5_1: R4_U_rele5.1
NetQ2_U_rele6_1: R4_U_rele6.1
NetQ2_U_rele7_1: R4_U_rele7.1
NetQ2_U_rele8_1: R4_U_rele8.1
NetQ2_U_rele9_1: R4_U_rele9.1
NetQ2_U_rele10_1: R4_U_rele10.1
NetQ2_U_rele11_1: R4_U_rele11.1
NetR1_1: R1.1 R2.2 U2.1
NetR7_U_SensorADC1_2: R7_U_SensorADC1.2
NetR7_U_SensorADC2_2: R7_U_SensorADC2.2
NetR7_U_SensorADC3_2: R7_U_SensorADC3.2
NetR7_U_SensorADC4_2: R7_U_SensorADC4.2
NetR10_1: R10.1 U5.61
NetU3_2: 
NetU3_3: 
NetU3_4: 
NetU3_5: 
NetU3_6: 
NetU3_11: 
NetU3_12: 
NetU3_13: 
NetU3_14: 
NetU3_15: 
NetU3_16: 
NetU3_23: 
NetU3_24: 
NetU3_25: 
NetU3_26: 
NetU3_27: 
NetU3_28: 
NetU4_4: U4.4 U5.45
NetU5_46: U5.46
PC4: APC.4
PC5: APC.3
PC6: U4.8 U5.38
RST: P2.5 R4.2
SCL: pressure1_U_i2csensor1.2 pressure1_U_i2csensor2.2 pressure1_U_i2csensor3.2 pressure1_U_i2csensor4.2 pressure1_U_i2csensor5.2 pressure1_U_i2csensor6.2 pressure1_U_i2csensor7.2 pressure1_U_i2csensor8.2
SCLK: P2.3
SDA: U1.3
VCC: C1.1 C3.1 C5_U_rele1.1 C5_U_rele2.1 C5_U_rele3.1 C5_U_rele4.1 C5_U_rele5.1 C5_U_rele6.1 C5_U_rele7.1 C5_U_rele8.1 C5_U_rele9.1 C5_U_rele10.1 C5_U_rele11.1 C6.1 C7.1 C15.1 C16.1 D1_U_rele1.1 D1_U_rele2.1 D1_U_rele3.1 D1_U_rele4.1 D1_U_rele5.1 D1_U_rele6.1 D1_U_rele7.1 D1_U_rele8.1 D1_U_rele9.1 D1_U_rele10.1 D1_U_rele11.1 napajalnik1.2 R3.1 U2.3 VR1.1 W1_U_rele1.1 W1_U_rele2.1 W1_U_rele3.1 W1_U_rele4.1 W1_U_rele5.1 W1_U_rele6.1 W1_U_rele7.1 W1_U_rele8.1 W1_U_rele9.1 W1_U_rele10.1 W1_U_rele11.1
pads on no net: APC.1 APC.2 APC.5 P1.3 U1.6 U1.9 U1.10 U1.11 U4.1 U5.2 U5.3 U5.4 U5.8 U5.9 U5.10 U5.11 U5.12 U5.13 U5.14 U5.17 U5.18 U5.19 U5.20 U5.21 U5.22 U5.23 U5.24 U5.25 U5.26 U5.30 U5.33 U5.34 U5.35 U5.36 U5.37 U5.39 U5.40 U5.41 U5.42 U5.43 U5.44 U5.51 U5.52 U5.53 U5.54 U5.55 U5.56 U5.57 U5.58 U5.59 U5.60 U5.62

## Text inside footprints (layer, text, board x,y; h text height)
C1: Top Overlay "+" at 10642.24,2708.8 h59.06
C2: Top Overlay "+" at 11007.42,2708.8 h59.06
C8: Top Overlay "+" at 9424.67,2008.96 h59.06
C9: Top Overlay "+" at 9114.61,2008.96 h59.06
P2: Top Overlay "6" at 8547.39,2097.69 h50 r90; Top Overlay "5" at 8647.39,2097.69 h50 r90; Top Overlay "2" at 8547.39,1737.69 h50 r90; Top Overlay "1" at 8647.39,1757.69 h50 r90